# Altium PCB FEU31_Part3_old.PcbDoc
Units mm, origin at the board's own origin, x right, y up, seen from the top; angles counter-clockwise.
Board outline 29.45 x 22.27 mm, 2 copper layers (Top Layer, Bottom Layer), stack 1.021 mm thick; 77 components, 72 nets, 276 pads, 16 vias.
Unrouted connection lines stored in the file: 86.
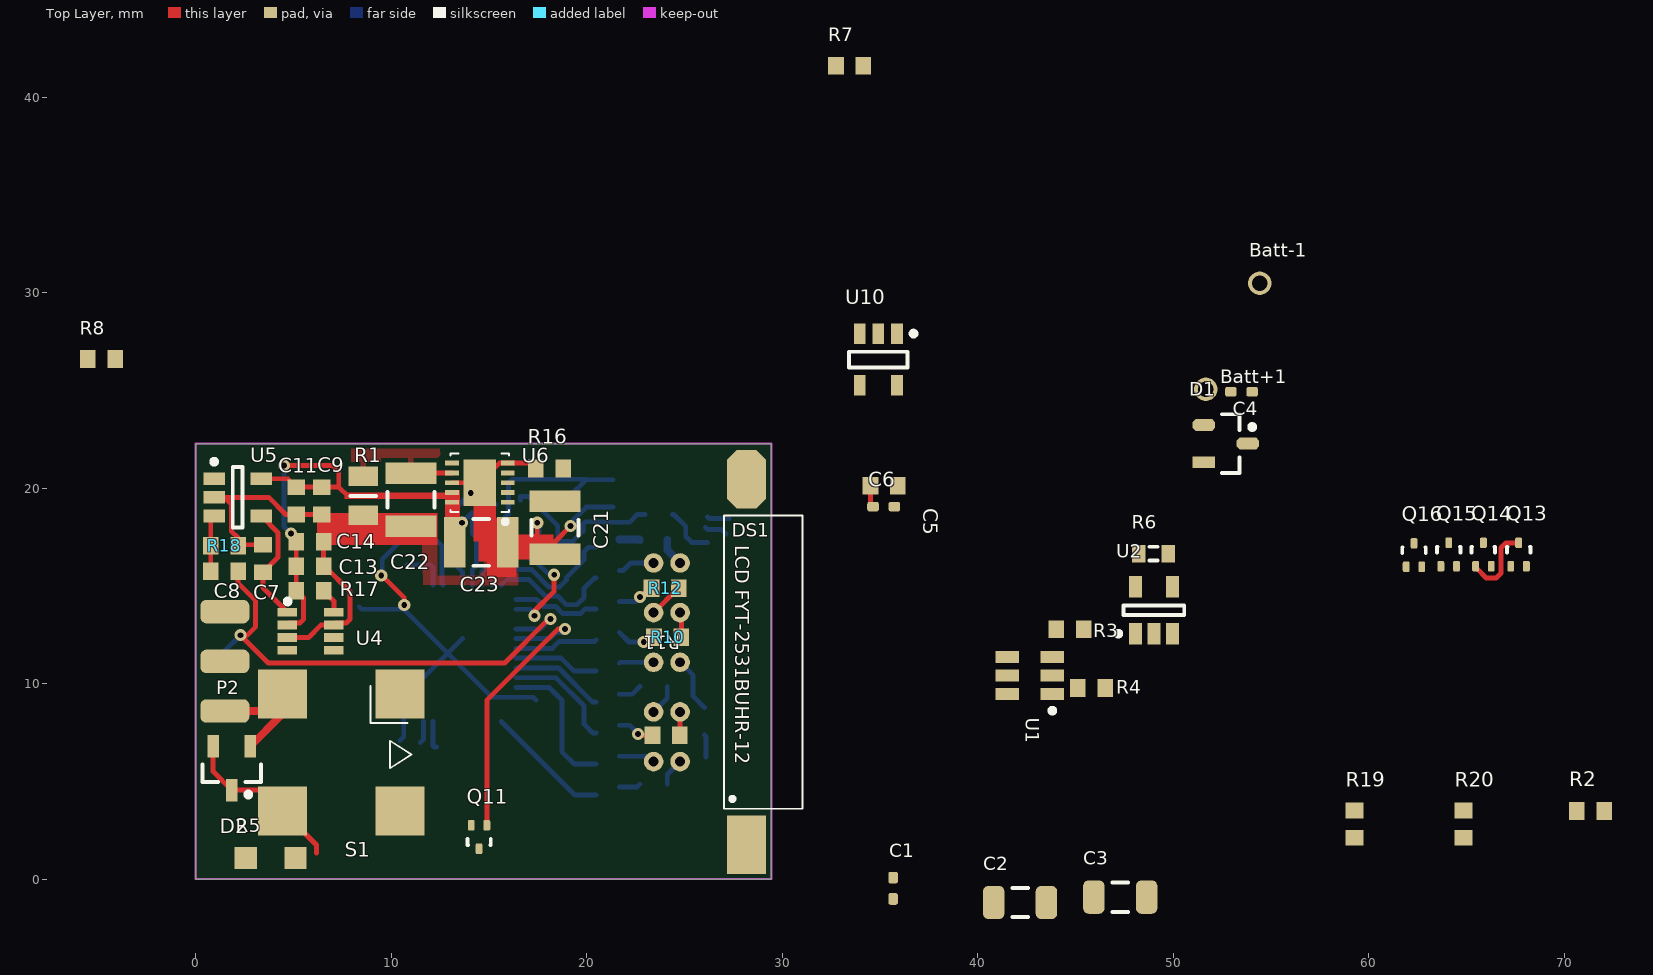
[diagram p0: Top Layer view]
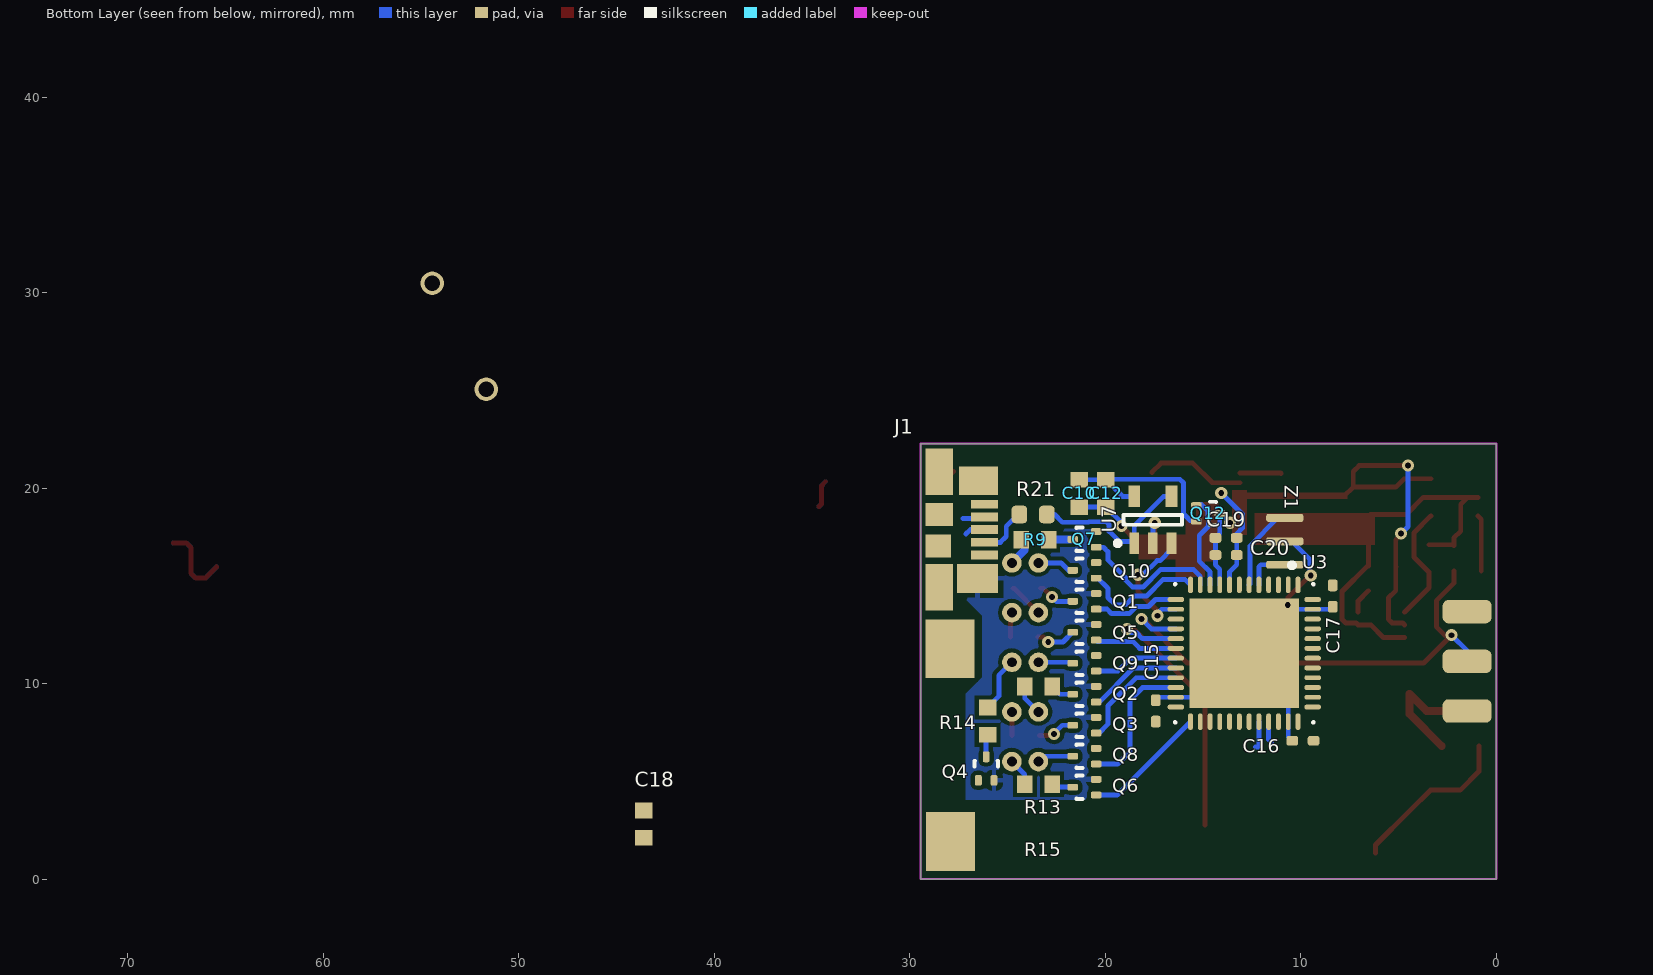
[diagram p1: Bottom Layer view, seen from below]

## Layer stack, top to bottom
Top Solder: solder mask 0.0102, Solder Resist, Dk 3.5
Top Layer: signal copper 0.0356
Dielectric1: dielectric 0.95, FR-4, Dk 4.8
Bottom Layer: signal copper 0.0356
Bottom Solder: solder mask 0.0102, Solder Resist, Dk 3.5

## Board outline
0,0 0,22.275 29.45,22.275 29.45,0

## Design rules (kind name [scope] priority, off if disabled: settings)
Clearance [All] p1: gap=0.2
ComponentClearance [All] p1: gap=0.1 collisioncheckmode=3 verticalgap=0.254 showdistances=TRUE
HoleSize [All] p1: absolutevalues=TRUE maxlimit=2.54 minlimit=0.3 maxpercent=80.000 minpercent=20.000
HoleToHoleClearance [All] p1: gap=0.152 allowstackedmicrovias=TRUE
MinimumAnnularRing [All] p1: minimumring=0.2
MinimumSolderMaskSliver [All] p1: minsoldermaskwidth=0.152
PlaneClearance [All] p1: clearance=2
PlaneConnect [All] p1: planeconnectstyle=Relief reliefexpansion=0.457 reliefentries=4 reliefconductorwidth=0.3 reliefairgap=0.457
PolygonConnect PolygonConnect_via [IsVia] p1: connectstyle=Direct reliefconductorwidth=0.254 reliefentries=4 polygonreliefangle="90 Angle" airgapwidth=0.254
PolygonConnect [All] p2: connectstyle=Relief reliefconductorwidth=0.254 reliefentries=4 polygonreliefangle="90 Angle" airgapwidth=0.254
RoutingVias [All] p1: holewidth=0.3 width=0.62 viastyle="Through Hole" minholewidth=0.3 minwidth=0.62 maxholewidth=6 maxwidth=4
SilkToSilkClearance [All] p1: silktosilkclearance=0.152
SilkToSolderMaskClearance SilkscreenOverComponentPads [IsPad] p1: minsilkscreentomaskgap=0.1 clearancetoexposedcopper=TRUE
SolderMaskExpansion [All] p1: expansion=0.1
Width [All] p1: maxlimit=2.254 minlimit=0.2 preferedwidth=0.2 minimp=50.000000 maximp=50.000000 favimp=50.000000
22 further rules are at their usual default settings.

## Components (designator, comment, footprint, x,y, rotation, side; value= is the part's Value field where it differs from the comment)
Batt+1 "" "Sensor contact" 51.675,25.05 r90 top
Batt-1 "" "Sensor contact" 54.436,30.478 r90 top
C1 "1uF" "0402 AVX" 35.683,-0.472 r0 top
C2 "4u7" C1206 42.175,-1.2 r0 top
C3 "100nF" C1206 47.3,-0.925 r0 top
C4 "1uF" "0402 AVX" 53.5,24.925 r270 top
C5 "10uF" 1608[0603] 35.225,20.125 r180 top
C6 "100nF" "0402 AVX" 35.2,19.05 r270 top
C7 "1nF" 1608[0603] 3.45,16.4 r90 top
C8 "47pF" 1608[0603] 1.475,15.75 r0 top
C9 "10nF" 1608[0603] 6.45,19.35 r270 top
C10 "10nF" 1608[0603] 21.35,19.725 r270 bottom
C11 "10uF" 1608[0603] 5.15,19.35 r270 top
C12 "10uF" 1608[0603] 19.975,19.725 r270 bottom
C13 "10nF" 1608[0603] 5.85,16 r0 top
C14 "10uF" 1608[0603] 5.85,17.25 r0 top
C15 "100nF" "0402 AVX" 17.425,8.6 r0 bottom
C16 "100nF" "0402 AVX" 9.9,7.075 r270 bottom
C17 "100nF" "0402 AVX" 8.375,14.475 r180 bottom
C18 "10uF" 1608[0603] 43.615,2.804 r90 bottom
C19 "1uF" "0402 AVX" 13.83,17.45 r90 bottom
C20 "100nF" "0402 AVX" 13.83,16.575 r90 bottom
C21 "4.7uF" C1210 18.391,17.975 r270 top
C22 "22uF" C1210 11.016,19.4 r270 top
C23 "10uF" C1210 14.616,17.225 r0 top
D1 "BAR43C" SOT23_N#1 52.7,22.275 r0 top
D2 "BAR43C" SOT23_N#2 1.85,5.675 r270 top
DS1 "FYT-2531BUHR-12_1" FYT-2531BUHR-12 27.786,11.089 r0 top locked
J1 "Micro-USB" 47346-0001 25.443,17.875 r270 bottom locked
P2 "Header 3X2" PLS_FLAT_CONN_6 1.5,11.138 r180 top
Q1 "RUM002N05T2L" RUM002N05 21.075,14.206 r0 bottom
Q2 "RUM002N05T2L" RUM002N05 21.075,9.453 r0 bottom
Q3 "RUM002N05T2L" RUM002N05 21.075,7.869 r0 bottom
Q4 "RUM002N05T2L" RUM002N05 26.1,5.65 r90 bottom
Q5 "RUM002N05T2L" RUM002N05 21.075,12.622 r0 bottom
Q6 "RUM002N05T2L" RUM002N05 21.075,4.7 r0 bottom
Q7 "RUM002N05T2L" RUM002N05 21.075,17.375 r0 bottom
Q8 "RZM002P02T2L" RUM002N05 21.075,6.284 r0 bottom
Q9 "RZM002P02T2L" RUM002N05 21.075,11.037 r0 bottom
Q10 "RZM002P02T2L" RUM002N05 21.075,15.791 r0 bottom
Q11 "RUM002N05T2L" RUM002N05 14.5,2.15 r270 top
Q12 "RZM002P02T2L" RUM002N05 14.75,18.7 r180 bottom
Q13 "RUM002N05T2L" RUM002N05 67.675,16.6 r90 top
Q14 "RZM002P02T2L" RUM002N05 65.875,16.6 r90 top
Q15 "RZM002P02T2L" RUM002N05 64.1,16.6 r90 top
Q16 "RZM002P02T2L" RUM002N05 62.325,16.575 r90 top
R1 "30.9k" 6-0805_M 8.575,19.6 r270 top
R2 "10k" 1608[0603] 71.358,3.479 r0 top
R3 "22R" 1608[0603] 44.725,12.775 r0 top
R4 "22R" 1608[0603] 45.825,9.775 r0 top
R5 "20R" "0805 sw-2012 std" 2.321,1.075 r0 top
R6 "62K" J1-0603 49,16.65 r180 top
R7 "10k" 1608[0603] 33.459,41.603 r0 top
R8 "10k" 1608[0603] -4.816,26.603 r0 top
R9 "90.9R" 1608[0603] 23.6,17.35 r180 bottom
R10 "90.9R" 1608[0603] 24.15,12.375 r180 top
R11 "90.9R" 1608[0603] 24.075,7.35 r180 top
R12 "90.9R" 1608[0603] 24.025,14.875 r180 top
R13 "90.9R" 1608[0603] 23.425,9.85 r180 bottom
R14 "90.9R" 1608[0603] 26.025,8.075 r270 bottom
R15 "90.9R" 1608[0603] 23.425,4.85 r180 bottom
R16 "10k" 1608[0603] 18.1,21 r180 top
R17 "47k" 1608[0603] 5.85,14.75 r180 top
R18 "10k" 1608[0603] 1.475,17.05 r0 top
R19 "10k" 1608[0603] 59.282,2.804 r90 top
R20 "10k" 1608[0603] 64.858,2.804 r90 top
R21 "6R" 1608[0603]_RES 23.7,18.65 r180 bottom
S1 "CMT-7525S-SMT" CMT-7525S-SMT 7.45,6.475 r180 top
U1 "USBLC6-2" SOT23-6L 42.675,10.414 r180 top
U2 "MCP73831T-2ACI/OT" SOT-23-OT5_N 49.025,13.75 r90 top
U3 "STM32L152CBU6" UFQFPN48 12.9,11.55 r270 bottom
U4 "AD5160BRJZ5" SOT-23-8 4.7,13.65 r0 top
U5 "LMV7239M5" MF05A_N 2.15,19.525 r0 top
U6 "LT3045EDD" "DFN-10 (3x3)" 14.541,20.275 r90 top
U7 "OPA353NA" ADI-RJ-5_N 17.575,18.375 r90 bottom
U10 "TPS78330DDCR" TPS78330DDCR 34.925,26.575 r270 top
Z1 "8MHZ_cap" PRQV8.00CR5010Y000 10.825,17.275 r270 bottom

## Footprints (in the part's own frame and the unit in brackets; to place one, negate y for a bottom-side part, rotate by r counter-clockwise, add the part's x,y. Pads: shape width x height; smd on the part's side, far side on the other; paste and mask are expansions set on the pad)
6-0805_M [mm] "Chip Resistor, Body 2.0x1.2mm, IPC Low Density"
  rect 1x1.5 smd: 1(-1,0) 2(1,0)
  silkscreen extent 0,-0.65 0,0.65, body extent -1.07,-0.7 1.07,0.7, height 0.7
"0402 AVX" [mm]
  rrect50% 0.5x0.6 smd: 1(0,0.545) 2(0,-0.545)
  body extent -0.26,-0.5 0.26,0.5, height 0.36
"0805 sw-2012 std" [mil] "Chip Capacitor, 2-Leads, Body 1,00x0,50mm, IPC Medium Density"
  rect 45x45 smd: 1(10,0) 2(110,0)
  body extent 18,-20 103,20, height 39
1608[0603] [mm] "Chip Capacitor, Body 1.6x0.8mm, IPC High Density"
  rect 0.8x0.9 smd: 1(-0.7,0) 2(0.7,0)
  body extent -0.87,-0.48 0.87,0.48, height 1.3
1608[0603]_RES [mm] "Chip Capacitor, Body 1.6x0.8mm, IPC High Density"
  rrect50% 0.8x0.9 smd: 1(-0.7,0) 2(0.7,0)
  body extent -0.85,-0.45 0.85,0.45, height 0.45
47346-0001 [mm] "Molex Mico-USB"
  rect 0.45x1.38 smd: 1(-1.3,-0.75) 2(-0.65,-0.75) 3(0,-0.75) 4(0.65,-0.75) 5(1.3,-0.75)
  rect 1.475x2 smd: MH1(-2.5,-1.05)
  rect 1.475x2.1 smd: MH2(2.5,-1.1)
  rect 2.375x1.4 smd: MH3(-2.95,-3.057) MH4(2.95,-3.057)
  rect 1.175x1.4 smd: MH3(-0.775,-3.057)
  rect 1.175x1.3 smd: MH4(0.85,-3.107)
  body extent -3.95,-5.52 4.03,-0.09, height 2.77
ADI-RJ-5_N [mm] "SOT-23, 5-Leads, Body 2.9x1.6mm, Pitch 0.95mm, IPC Medium Density"
  rect 1.1x0.5 smd: 1(-1.2,0.95) 2(-1.2,0) 3(-1.2,-0.95)
  rect 1.1x0.6 smd: 4(1.2,-0.95) 5(1.2,0.95)
  silkscreen extent -1.32,-1.5 0.25,1.93, body extent -0.85,-1.5 0.85,1.5, height 1.45
C1206 [mm] "Chip Capacitor, Body 3.2x1.6mm, IPC High Density"
  rrect50% 1.1x1.7 smd: 1(-1.35,0) 2(1.35,0)
  silkscreen extent -0.4,-0.75 0.4,0.75, body extent -1.6,-0.81 1.6,0.79, height 1.6
C1210 [mm] "Chip Capacitor, Body 3.2x2.5mm, IPC High Density"
  rect 1.1x2.6 smd: 1(-1.35,0) 2(1.35,0)
  silkscreen extent -0.4,-1.2 0.4,1.2, body extent -1.7,-1.35 1.7,1.35, height 1.3
CMT-7525S-SMT [mm]
  rect 2.5x2.5 smd: 0(-3,3) 1(-3,-3) +(3,-3) -(3,3)
  silkscreen extent -3.6,-3.4 -1.5,0.8, body extent -3.8,-3.75 3.7,3.75, height 2.5
"DFN-10 (3x3)" [mm]
  rect 0.25x0.7 smd: 1(-1,-1.425) 2(-0.5,-1.425) 3(0,-1.425) 4(0.5,-1.425) 5(1,-1.425) 6(1,1.425) 7(0.5,1.425) 8(0,1.425) 9(-0.5,1.425) 10(-1,1.425)
  rect 2.38x1.65 smd: 11(0,0)
  silkscreen extent -2.1,-1.5 1.5,1.5, body extent -1.5,-1.5 1.5,1.5, height 0.8
FYT-2531BUHR-12 [mm]
  round 1 hole 0.5: 1(-3,-5.08) 2(-3,-2.54) 3(-3,0) 4(-3,2.54) 5(-3,5.08) 6(-4.356,5.08) 7(-4.356,2.54) 8(-4.356,0) 9(-4.356,-2.54) 10(-4.356,-5.08)
  silkscreen extent -0.74,-7.49 3.26,7.52, body extent -0.7,-7.5 3.3,7.5, height 8
J1-0603 [mm] "Chip Resistor, Body 1.6x0.8mm, IPC High Density"
  rect 0.7x0.9 smd: 1(-0.75,0) 2(0.75,0)
  silkscreen extent -0.2,-0.35 0.2,0.35, body extent -0.85,-0.48 0.85,0.48, height 0.9
MF05A_N [mm] "SOT23, 5-Leads, Body 2.9x1.6mm, Pitch 0.95mm, Lead Span 2.8mm, IPC Medium Density"
  rect 1.1x0.65 smd: 1(-1.2,0.95) 2(-1.2,0) 3(-1.2,-0.95) 4(1.2,-0.95) 5(1.2,0.95)
  silkscreen extent -1.32,-1.55 0.25,1.95, body extent -0.9,-1.55 0.9,1.55, height 1.19
PLS_FLAT_CONN_6 [mm]
  rrect50% 2.5x1.2 smd far side: 1(0,-2.54) 3(0,0) 5(0,2.54)
  rrect50% 2.5x1.2 smd: 2(0,-2.54) 4(0,0) 6(0,2.54)
PRQV8.00CR5010Y000 [mm]
  rrect50% 0.4x1.9 smd: 1(-1.2,0) 2(1.2,0) 3(0,0)
  body extent -1.6,-0.65 1.6,0.65, height 1
RUM002N05 [mm] "SOTFL, 3-Leads, Body 1,20x1,20mm, Pitch 0,40mm, IPC Medium Density"
  rrect50% 0.55x0.35 smd: 1(-0.6,0.4) 2(-0.6,-0.4) 3(0.6,0)
  silkscreen extent 0.1,-0.6 0.4,0.6, body extent -0.53,-0.62 0.52,0.63, height 0.45
"Sensor contact" [mm]
  round 1.2 hole 0.8: 1(0,0)
SOT23-6L [mm]
  rect 1.2x0.6 smd: 1(-1.15,0.95) 2(-1.15,0) 3(-1.15,-0.95) 4(1.15,-0.95) 5(1.15,0) 6(1.15,0.95)
  silkscreen extent -1.28,1.68 -1.03,1.92, body extent -0.75,-1.52 0.75,1.53, height 1.45
SOT23_N#1 [mm] "SOT23, 3-Leads, Body 2.9x1.3mm, Pitch 0.95mm, Lead Span 2.3mm - Reverse Pinning, IPC Medium Density"
  oct 1.15x0.6 smd: 1(1.125,0) 3(-1.125,0.95)
  rect 1.15x0.6 smd: 2(-1.125,-0.95)
  silkscreen extent -0.2,-1.5 1.48,1.5, body extent -0.7,-1.5 0.7,1.5, height 1.1
SOT23_N#2 [mm] "SOT23, 3-Leads, Body 2.9x1.3mm, Pitch 0.95mm, Lead Span 2.3mm - Reverse Pinning, IPC Medium Density"
  rect 1.15x0.6 smd: 1(1.125,0) 2(-1.125,-0.95) 3(-1.125,0.95)
  silkscreen extent -0.2,-1.5 1.47,1.5, body extent -0.7,-1.5 0.7,1.5, height 1.1
SOT-23-8 [mm]
  rect 1x0.45 smd: 1(0,0) 2(0,-0.65) 3(0,-1.3) 4(0,-1.95) 5(2.375,-1.95) 6(2.375,-1.3) 7(2.375,-0.65) 8(2.375,0)
  silkscreen extent -0.11,0.43 0.14,0.67, body extent -0.22,-2.47 2.58,0.47, height 1.2
SOT-23-OT5_N [mm] "SOT23, 5-Leads, Body 2.9x1.6mm, Pitch 0.95mm, Lead Span 2.7mm, IPC Medium Density"
  rect 1.1x0.65 smd: 1(-1.2,0.95) 2(-1.2,0) 3(-1.2,-0.95) 4(1.2,-0.95) 5(1.2,0.95)
  silkscreen extent -1.32,-1.55 0.25,1.95, body extent -0.9,-1.55 0.9,1.55, height 1.45
TPS78330DDCR [mm] "SOT23, 5-Leads, Body 3,0x3,5mm (max), Pitch 0,95mm, IPC Medium Density"
  rect 1.05x0.6 smd: 1(-1.325,0.95) 2(-1.325,0) 3(-1.325,-0.95) 4(1.325,-0.95) 5(1.325,0.95)
  silkscreen extent -1.45,-1.5 0.4,1.93, body extent -0.73,-1.52 0.72,1.53, height 1.1
UFQFPN48 [mm]
  oval 0.85x0.25 smd: 1(-3.5,2.75) 2(-3.5,2.25) 3(-3.5,1.75) 4(-3.5,1.25) 5(-3.5,0.75) 6(-3.5,0.25) 7(-3.5,-0.25) 8(-3.5,-0.75) 9(-3.5,-1.25) 10(-3.5,-1.75) 11(-3.5,-2.25) 12(-3.5,-2.75) 25(3.5,-2.75) 26(3.5,-2.25) 27(3.5,-1.75) 28(3.5,-1.25) 29(3.5,-0.75) 30(3.5,-0.25) 31(3.5,0.25) 32(3.5,0.75) 33(3.5,1.25) 34(3.5,1.75) 35(3.5,2.25) 36(3.5,2.75)
  oval 0.25x0.85 smd: 13(-2.75,-3.5) 14(-2.25,-3.5) 15(-1.75,-3.5) 16(-1.25,-3.5) 17(-0.75,-3.5) 18(-0.25,-3.5) 19(0.25,-3.5) 20(0.75,-3.5) 21(1.25,-3.5) 22(1.75,-3.5) 23(2.25,-3.5) 24(2.75,-3.5) 37(2.75,3.5) 38(2.25,3.5) 39(1.75,3.5) 40(1.25,3.5) 41(0.75,3.5) 42(0.25,3.5) 43(-0.25,3.5) 44(-0.75,3.5) 45(-1.25,3.5) 46(-1.75,3.5) 47(-2.25,3.5) 48(-2.75,3.5)
  rect 5.6x5.6 smd paste-2.5: 49(0,0)
  silkscreen extent -4.62,-3.55 3.55,3.55, body extent -3.51,-3.51 3.51,3.51, height 0.78

## Part data
Batt+1 Batt-1: library part Plug, "Plug"
C1 C4 C5 C6 C7 C8 C9 C10 C11 C12 C13 C14 C15 C16 C17 C18 C19 C20 C21 C22 C23: library part "Cap Semi", "Capacitor (Semiconductor SIM Model)"
C2 C3: library part CAPACITOR, "Capacitor (Semiconductor SIM Model)"
D1 D2: library part BAT54C, "Schottky Barrier Double Diode"
DS1: "7-segment 3x indicator"
J1: library part 0481900001, "USB On-The-Go (OTG) Mini-B Receptacle, Right Angle, SMT, 0.80mm (.031\") Pitch, Solder Tabs with Back Cover, Recessed Type"
P2: "Header, 3-Pin, Dual row"
Q1 Q2 Q3 Q4 Q5 Q6 Q7 Q11 Q13: library part IRLML2402, "HEXFET Power MOSFET"
Q8 Q9 Q10 Q12 Q14 Q15 Q16: library part IRLML6401, "HEXFET Power MOSFET"
R1 R2 R3 R4 R5 R7 R8 R9 R10 R11 R12 R13 R14 R15 R16 R17 R18 R19 R20 R21: library part "Resistor 0805"
R6: library part Res3, "Resistor"
U2: "Miniature Single-Cell, Fully Integrated Li-Ion, Li-Polymer Charge Management Controller, 4.2V, 5-Pin SOT-23, Industrial Temperature, Tape and Reel"
U5: "45 nsec, Ultra Low Power, Low Voltage, Rail-to-Rail Input Comparator with Open-Drain/Push-Pull Output, 5-pin SOT-23"
U7: library part AD8541ARTZ-R2, "Single Channel RRIO Operational Amplifier, 1 MHz BW, 920 mV/us SR, Industrial, 5-pin SOT23 (RJ-5), Reel"

## Free pads (board coordinates)
  rect 2x3 smd: 17(28.175,1.75)
  oct 2x3 smd: 17(28.175,20.45)
  rect 2.5x3 smd far side: 18(27.925,1.925) 19(27.95,11.775)

## Via types
v1: diameter 0.62, hole 0.3, Top Layer to Bottom Layer, tented both sides, 16 vias

## Nets (pads, with @x,y where several pads share a name; then routed paths per layer and width w, separated by ;. In a path a pad name is that pad's centre, name@x,y a point inside that pad or via, vN(x,y) a via of type N, cw(c..) or ccw(c..) an arc to the next point about the centre after c; other vN are vias at no path point)
+5: C1.2 D1.1 J1.1 Q13.1 U1.5 U2.4
+DATA: J1.3 R4.2 | length 1.2
  Bottom Layer w0.25: J1.3@26.093,17.975 J1.3 26.918,17.875 27.134,17.659
"+DATA ESD": U1.4 U3.33 | length 1.1
  Bottom Layer w0.25: 11.5,6.975 11.65,7.125 U3.33
-DATA: J1.2 R3.2 | length 1.1
  Bottom Layer w0.25: J1.2 26.278,18.44 27.29,18.44
"-DATA ESD": U1.6 U3.32 | length 1.4
  Bottom Layer w0.25: U3.32 12.15,6.8 12.2,6.75 12.326,6.75
"ADC START EXTI_15": U3.38 U5.1
AVCC: C9.1 C11.1 C13.1 C14.1 C19.1 C20.1 C23.1 P2.4 Q12.3 R17.2 U3.9 U4.2 U5.5 U6.9 U6.10 | length 22.3
  Top Layer w0.25: U5.5 4.725,20.475 C11.1 C9.1 7.325,20.05 ; v1(4.525,21.15) 7.025,21.15 7.325,20.85 7.325,20.05 ; U4.2 4.8,13.1 5.335,13.1 5.525,13.29 5.525,14.375 R17.2 5.15,15.95 5.125,15.975 C13.1 C14.1 5.15,17.35 4.875,17.625 v1(4.875,17.676) ; 7.8,19.575 7.325,20.05
  Bottom Layer w0.25: v1(4.525,21.15) 4.525,18.026 v1(4.875,17.676) ; v1(13.625,18.225) Q12.3@14.15,18.75 ; U3.9 14.15,15.85 14.375,16.075 C20.1 C19.1 14.15,17.675 Q12.3@14.15,18.625
BAT: Batt+1.1 C4.2 D1.2 R7.2 U2.3
"BAT VOLTAGE": R7.1 R8.2
"BAT VOLTAGE EN": R8.1
C_DIG1: Q8.1 U3.22 | length 7.2
  Bottom Layer w0.25: U3.22 18.1,9.8 18.74,9.16 18.74,6.519 19.375,5.884 Q8.1
C_DIG2: Q9.1 U3.19 | length 4.3
  Bottom Layer w0.25: U3.19 18.702,11.3 19.364,10.637 Q9.1
C_DIG3: Q10.1 U3.12 | length 6.3
  Bottom Layer w0.25: U3.12 15.915,15.315 17.059,15.315 17.895,14.48 18.516,14.48 18.966,14.03 19.503,14.03 19.875,14.402 19.875,14.865 19.886,14.876 19.886,14.886 20.391,15.391 Q10.1
C_SEG_A: Q1.1 U3.13 | length 4.5
  Bottom Layer w0.25: U3.13 17.438,14.3 17.796,13.942 18.418,13.942 18.78,13.58 19.69,13.58 19.916,13.806 Q1.1
C_SEG_B: Q2.1 U3.20 | length 4.8
  Bottom Layer w0.25: U3.20 18.566,10.8 20.312,9.053 Q2.1
C_SEG_C: Q3.1 U3.21 | length 5.8
  Bottom Layer w0.25: U3.21 18.429,10.3 19.875,8.854 19.875,7.925 20.331,7.469 Q3.1
C_SEG_D: Q4.1 U3.46
C_SEG_E: Q5.1 U3.18 | length 4.2
  Bottom Layer w0.25: U3.18 18.248,11.8 18.608,12.16 20.413,12.16 Q5.1
C_SEG_F: Q6.1 U3.25 | length 6.4
  Bottom Layer w0.25: U3.25 19.4,4.3 Q6.1
C_SEG_G: Q7.1 U3.11 | length 7.5
  Bottom Layer w0.25: U3.11 15.15,15.486 15.504,15.841 17.17,15.841 18.081,14.93 18.607,14.93 18.733,15.056 18.979,15.302 18.979,15.431 19.875,16.327 19.875,16.752 20.098,16.975 Q7.1
"CHARGE DETECT": U2.1
CLK: U3.37
CS_FRONT: U4.6
D_SEG_A: Q1.3 R12.2 | length 1.9
  Top Layer w0.25: v1(22.733,14.433) 23.175,14.875 R12.2
  Bottom Layer w0.25: Q1.3 22.506,14.206 v1(22.733,14.433)
D_SEG_B: Q2.3 R13.2 | length 1.2
  Bottom Layer w0.25: Q2.3 22.328,9.453 R13.2
D_SEG_C: Q3.3 R11.2 | length 1.9
  Top Layer w0.25: v1(22.625,7.425) 22.7,7.35 R11.2
  Bottom Layer w0.25: Q3.3 22.206,7.869 v1@22.637,7.438
D_SEG_D: Q4.3 R14.2 | length 1.2
  Bottom Layer w0.25: R14.2 26.1,7.3 Q4.3
D_SEG_E: Q5.3 R10.2 | length 2.1
  Top Layer w0.25: v1(22.925,12.125) 23.175,12.375 R10.2
  Bottom Layer w0.25: Q5.3 22.172,12.125 v1(22.925,12.125)
D_SEG_F: Q6.3 R15.2 | length 1.1
  Bottom Layer w0.25: Q6.3 22.575,4.7 R15.2
D_SEG_G: Q7.3 R9.2 | length 1.1
  Bottom Layer w0.4: Q7.3 22.7,17.375 R9.2@22.725,17.35
DAC_OUT: U3.14 U7.3 | length 6.2
  Top Layer w0.25: v1(17.335,13.468) 17.335,13.71 18.344,14.719 v1(18.344,15.565)
  Bottom Layer w0.25: U3.14 17.127,13.8 17.335,13.592 v1(17.335,13.468) ; U7.3 16.625,16.865 17.2,16.291 17.357,16.291 18.082,15.565 v1(18.344,15.565)
DAC_OUT2: U3.15
DAC_OUT_ON: Q12.1 U3.10 | length 4.9
  Bottom Layer w0.25: U3.10 14.65,15.714 15.2,16.264 15.2,17.575 14.742,18.033 14.742,18.483 14.75,18.492 14.75,18.825 15.075,19.15 Q12.1@15.35,19.15
GND: Batt-1.1 C1.1 C2.1 C3.1 C4.1 C5.2 C6.2 C7.2 C9.2 C10.2 C11.2 C12.2 C13.2 C14.2 C15.2 C16.2 C17.2 C18.2 C19.2 C20.2 C21.2 C22.2 C23.2 J1.5 J1.MH1 J1.MH2 J1.MH3 J1.MH4 P2.5 pad.17 pad.18 Q1.2 Q2.2 Q3.2 Q4.2 Q5.2 Q6.2 Q7.2 Q11.2 Q13.2 R1.2 R6.1 R16.2 R18.2 U1.2 U2.2 U3.8 U3.23 U3.35 U3.44 U3.47 U3.49 U4.3 U4.7 U5.2 U6.5 U6.8 U6.11 U7.2 U10.2 U10.4 Z1.3 | length 59.5
  Top Layer w0.25: U5.2 U5.2@1.475,19.525 ; C7.2 2.225,17.1 R18.2 2.175,17.45 1.825,17.8 1.825,19.175 U5.2@1.475,19.525 ; U4.3 5.775,12.35 6.425,13 U4.7 7.175,13.1 7.71,13.1 7.9,13.29 7.9,14.71 6.61,16 C13.2 C14.2 ; C9.2 C11.2 4.61,18.65 3.735,19.525 U5.2@1.475,19.525 ; v1(9.5,15.526) 9.525,15.55 10.675,14.4 v1(10.675,14.025) ; U6.8 U6.11 14.541,20.285 15.531,21.275 U6.5 17.15,21.275 R16.2@17.625,20.8 ; v1(14.075,19.75) U6.11@14.1,19.75 ; v1(17.475,18.225) 17.475,17.625 17.275,17.425 C21.2@17.675,17.025 ; C21.2@18.391,16.9 18.391,17.266 v1(19.176,18.051) ; pad.17@27.775,20.85 pad.17@28.175,20.45 ; C5.2@34.325,20.325 C5.2 34.525,19.18 C6.2
  Bottom Layer w0.25: C17.2 8.505,13.8 U3.47 10.65,13.8 U3.49 ; v1(9.5,15.526) v1@9.549,15.526 ; v1@9.55,15.525 9.55,16.351 10.474,17.275 Z1.3 ; C16.2 10.65,7.28 U3.35 10.65,9.3 U3.49 ; U3.49@13.65,12.3 U3.49 ; U3.8 13.65,15.71 13.285,16.075 C20.2 C19.2 13.285,17.667 12.99,17.962 12.99,18.665 v1(14.075,19.75) ; C15.2 17.27,9.3 U3.23 15.15,9.3 U3.49 ; v1(17.475,18.225) 17.575,18.125 U7.2 ; v1(19.176,18.051) 19.176,18.226 C12.2 C10.2
IO: U3.34
KEY_POWER_HOLD: Q15.1 R19.1
MCU_POWER_HOLD: Q16.1 R20.1
NetC7_1: C7.1 U4.1 U5.4 | length 6.1
  Top Layer w0.25: U5.4 4.225,17.7 4.225,16.475 C7.1 3.45,14.9 U4.1
NetC8_1: C8.1 R18.1 U5.3 | length 2.9
  Top Layer w0.25: C8.1 R18.1 0.775,18.4 U5.3
NetC10_1: C10.1 C12.1 Q12.2 U7.5 | length 9.6
  Bottom Layer w0.25: Q12.2@15.35,18.35 15.675,18.35 16,18.675 16,20.26 16.19,20.45 19.975,20.45 C12.1 ; U7.5 19.125,19.575 C12.1 ; C10.1 C12.1
NetC22_1: C22.1 R1.1 U6.7 | length 2.1
  Top Layer w0.25: C22.1 11.041,20.775 U6.7
NetD2_1: D2.1 D2.2 R5.1 S1.- | length 8.6
  Top Layer w0.25: D2.2 0.9,5.5 D2.1 3.375,4.55 S1.- 6.185,1.74 6.185,1.325
NetDS1_1: DS1.1 R15.1 | length 1.4
  Bottom Layer w0.25: R15.1 24.125,5.348 DS1.1
NetDS1_2: DS1.2 R11.1 | length 1.2
  Top Layer w0.25: R11.1 24.786,7.361 DS1.2
NetDS1_3: DS1.3 R14.1 | length 2.8
  Bottom Layer w0.25: DS1.3 25.45,10.425 25.45,9.35 R14.1
NetDS1_4: DS1.4 R10.1 | length 1.3
  Top Layer w0.25: DS1.4 24.85,13.565 R10.1
NetDS1_5: DS1.5 R9.1 | length 1.5
  Bottom Layer w0.4: R9.1@24.125,17.35 24.125,16.83 DS1.5
NetDS1_6: DS1.6 Q10.3 | length 1.9
  Bottom Layer w0.25: Q10.3 21.891,15.791 22.269,16.169 DS1.6
NetDS1_7: DS1.7 R12.1 | length 1.8
  Top Layer w0.25: DS1.7 24.676,14.875 R12.1
NetDS1_8: DS1.8 Q9.3 | length 1.8
  Bottom Layer w0.25: Q9.3 21.727,11.089 DS1.8
NetDS1_9: DS1.9 R13.1 | length 1.6
  Bottom Layer w0.25: DS1.9 24.125,9.244 R13.1
NetDS1_10: DS1.10 Q8.3 | length 1.9
  Bottom Layer w0.25: Q8.3 23.155,6.284 DS1.10
NetQ11_3: Q11.3 R5.2
NetQ13_3: Q13.3 Q14.1 R2.1 | length 4
  Top Layer w0.25: Q14.1 65.475,15.942 66.017,15.4 66.533,15.4 66.775,15.642 66.775,16.95 67.025,17.2 Q13.3
NetR3_1: R3.1 U1.1
NetR4_1: R4.1 U1.3
NetR6_2: R6.2 U2.5
NetR17_1: R17.1 U4.8 | length 1.3
  Top Layer w0.25: R17.1 7.075,14.225 U4.8
NetR21_2: R21.2 U7.1 U7.4 | length 8.9
  Bottom Layer w0.25: U7.4@16.625,19.385 U7.4 17.023,19.575 18.525,18.073 U7.1@18.525,17.275 ; U7.1 U7.1@18.525,17.275 ; R21.2 22.6,18.65 22.2,18.25 20.858,18.25 20.833,18.275 19.948,18.275 19.811,18.138 19.811,17.788 19.298,17.275 U7.1@18.525,17.275
NetU3_5: U3.5 Z1.2 | length 2.3
  Bottom Layer w0.25: Z1.2 12.05,16.075 12.15,15.975 U3.5
NetU3_6: U3.6 Z1.1 | length 4.4
  Bottom Layer w0.25: Z1.1 11.176,18.475 12.6,17.051 12.6,15.1 U3.6
PULSE: P2.1
PUMP: C2.2 C3.2 C21.1 D1.3 D2.3 P2.6 Q14.3 Q15.3 Q16.3 R2.2 R19.2 R20.2 S1.+ U6.1 U6.2 U10.1 | length 6.7
  Top Layer w0.4: P2.6 3.573,8.598 S1.+ 4.45,8.45 D2.3
PW_ON: Q14.2 Q15.2 Q16.2 R16.1 U6.3 U6.6 U10.3
SIGIN: C8.2 P2.3 U3.16 | length 25
  Top Layer w0.25: C8.2 2.175,15.136 3.075,14.236 3.075,12.909 2.616,12.45 ; v1(2.3,12.475) 3.725,11.05 15.815,11.05 18.072,13.307 v1(18.155,13.307)
  Bottom Layer w0.25: P2.3 1.5,11.675 v1(2.3,12.475) ; U3.16 17.648,12.8 v1(18.155,13.307) ; v1@17.97,13.205 v1@17.97,13.369
SOUND: Q11.1 U3.17 | length 14.6
  Top Layer w0.25: Q11.1 14.9,9.154 18.547,12.801 v1(18.901,12.801)
  Bottom Layer w0.25: U3.17 18.112,12.3 18.422,12.61 18.71,12.61 v1(18.901,12.801)
SPI2_MISO: U3.27
SPI2_MOSI: U3.28 U4.5
SPI2_SCK: U3.26 U4.4
USB_SIG_OUT: J1.4 R21.1 | length 2.7
  Bottom Layer w0.25: R21.1 24.463,18.65 25.075,18.038 25.075,17.525 25.375,17.225 J1.4
VCC: C5.1 C6.1 C15.1 C16.1 C17.1 C18.1 Q8.2 Q9.2 Q10.2 U3.24 U3.36 U3.48 U10.5
VSENS: P2.2 U3.40
pads on no net: S1.0 S1.1 U3.1 U3.2 U3.3 U3.4 U3.7 U3.29 U3.30 U3.31 U3.39 U3.41 U3.42 U3.43 U3.45 U6.4

## Polygon pours and split planes (outlines as drawn)
GND on Bottom Layer "Top Layer-No Net" (solid, pour order 0): 20.225,18 24.475,18 24.625,18 25.65,16.975 27.45,16.975 27.45,14.625 26.3,13.475 26.3,10.325 27.15,9.475 27.15,4.05 20.775,4.05 20.25,4.575 20.25,18.025
GND on Top Layer "Top Layer-No Net" (solid, pour order 4): 12.366,18.95 12.041,19.275 9.37,19.275 7.866,19.275 7.841,19.25 7.791,19.2 7.791,17.9 11.598,17.234 11.643,15.055 16.516,15 16.516,16.9 14.766,16.9 14.766,15.8 14.516,15.55 12.366,15.525 12.366,15.725 12.366,15.95 12.366,18.8
NetC22_1 on Top Layer "Top Layer-No Net" (solid, pour order 2): 12.486,19.275 8.516,19.275 7.991,19.8 7.966,19.825 7.966,22.025 12.066,22.025 12.491,22.025 12.516,21.575

## Keep-outs
Keep-Out Layer:
  the board outline again, w0.1

## Other copper
Top Layer:
  rectangle net GND: 14.475,16.25 15.9,18.475
  rectangle net GND: 6.2,17.1 12.366,18.725
  rectangle net AVCC: 7.625,19.45 13.116,19.775
  region net GND: 16.416,16.9 14.916,16.9 14.916,15.45 16.416,15.45
  region net AVCC: 13.516,19.9 12.766,19.9 12.766,17.6 13.516,17.6
  region net GND: 18.316,17.625 15.041,17.625 15.041,16.35 18.316,16.35
  region net GND: 15.366,19.275 14.216,19.275 14.216,17.275 15.366,17.275

## Text inside footprints (layer, text, board x,y; h text height)
DS1: Top Overlay "LCD FYT-2531BUHR-12" at 27.387,17.083 h1.2 r270